# EAGLE board PygmyPI_v1p00 (EAGLE 5.11)
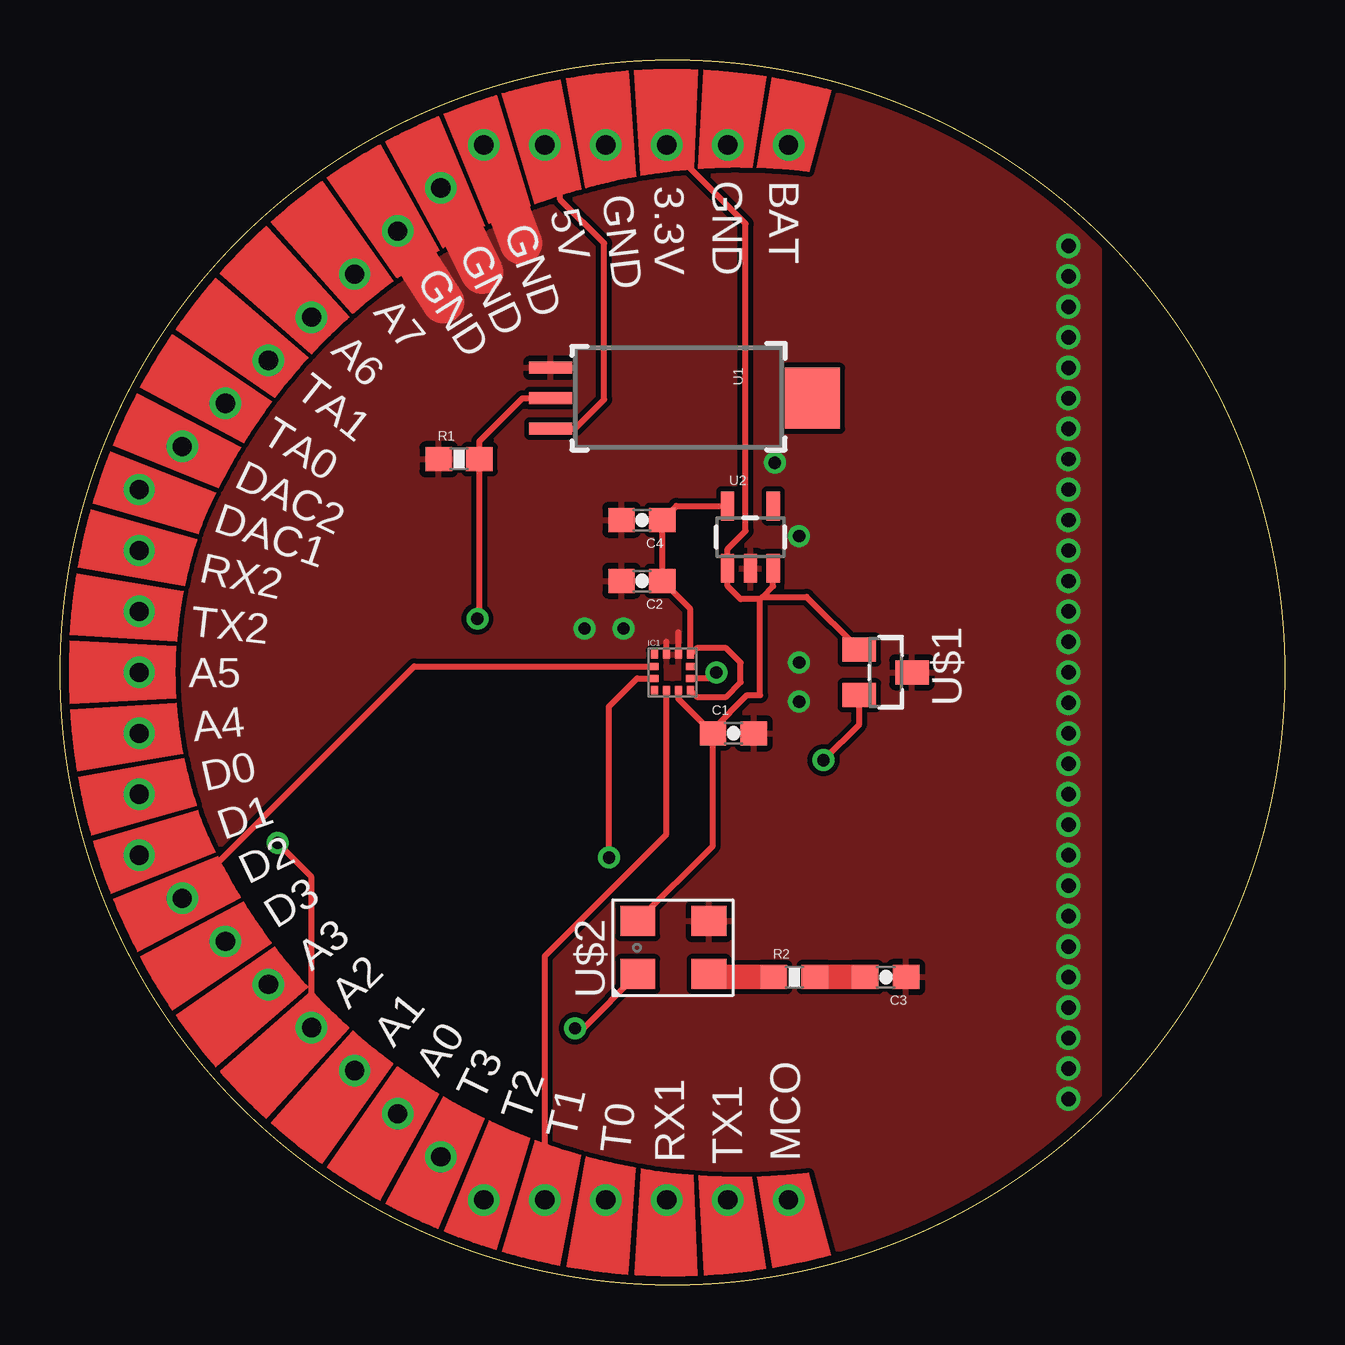
[diagram p0: board, top side]
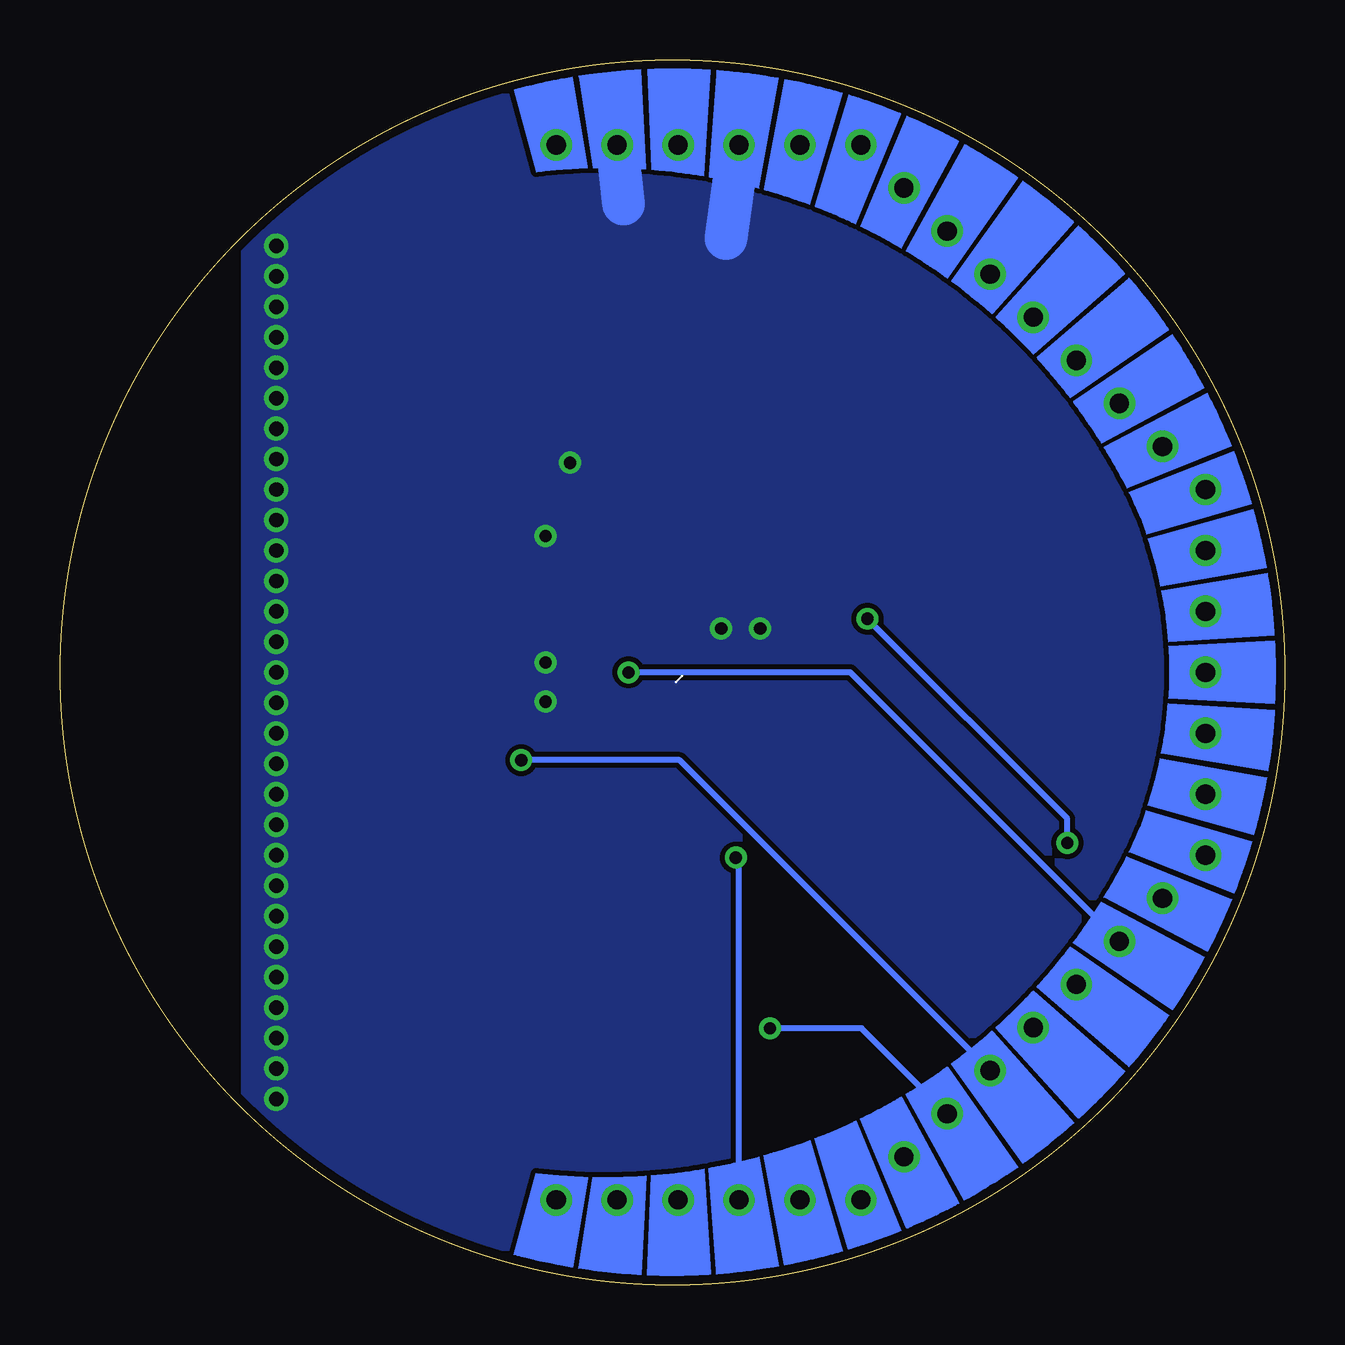
[diagram p1: board, bottom side, seen from below]

Size 51.05 x 51.05 mm. Coordinates in mm from the lower left corner, seen from the top.
Outline: circle at 25.53,25.53 radius 25.53
Copper layers (1*16): Top 0.035mm / dielectric 1.5mm / Bottom 0.035mm
Design rules "PDX (Proto)": minimum track width 6mil, minimum drill 15mil, track to track 6mil, track to pad 6mil, pad to pad 4mil, via to via 6mil, smd to smd 4mil, copper to edge 15mil, drill to drill 6mil, minimum pad ring 10mil, minimum via ring 8mil, stop-mask expansion 4mil, vias tented up to drill 0mil, thermal gap 10mil

## Footprints (pad centres in the part's own frame; a part is rotated, then mirrored left to right if it is on the bottom)
0603-CAP = smd 1.1 x 1: 1 -0.85,0; 2 0.85,0
#ETX-HOLES = drill 0.8 round: 3.3V -0.237,-21.988; 5V -5.316,-21.988; A0 -11.448,18.396; A1 -13.245,16.6; A2 -15.04,14.804; A3 -16.837,13.008; A4 -22.225,2.54; A5 -22.225,0; A6 -15.04,-14.804; A7 -13.245,-16.6; BAT 4.843,-21.988; COM1_RX -0.236,21.988; COM1_TX 2.304,21.988; COM2_RX -22.225,-5.08; COM2_TX -22.225,-2.54; D0 -22.225,5.08; D1 -22.225,7.62; D2 -20.429,9.416; D3 -18.633,11.212; DAC1 -22.225,-7.62; DAC2 -20.429,-9.416; GND1 -11.448,-18.396; GND2 -9.652,-20.192; GND3 -7.856,-21.988; GND4 -2.776,-21.988; GND5 2.303,-21.988; MCO 4.844,21.988; T0 -2.776,21.988; T1 -5.316,21.988; T2 -7.856,21.988; T3 -9.652,20.192; TA0 -18.633,-11.212; TA1 -16.837,-13.008
LGA12 = smd 0.3 x 0.35: 1 -0.75,-0.75; 2 -0.25,-0.75; 3 0.25,-0.75; 4 0.75,-0.75; 7 0.75,0.75; 8 0.25,0.75; 9 -0.25,0.75; 10 -0.75,0.75 | smd 0.35 x 0.3: 5 0.75,-0.25; 6 0.75,0.25; 11 -0.75,0.25; 12 -0.75,-0.25
0603-RES = smd 1.1 x 1: 1 -0.85,0; 2 0.85,0
HIH-4030 = smd 0.508 x 1.778: 1 -1.27,-5.08; 2 0,-5.08; 3 1.27,-5.08 | smd 2.54 x 2.286: NC 0,5.842
SOT23-5 = smd 0.55 x 1.2: 1 -0.95,-1.3; 2 0,-1.3; 3 0.95,-1.3; 4 0.95,1.3; 5 -0.95,1.3
SOT23 = smd 1 x 1.4: 1 -0.95,-1.1; 2 0.95,-1.1; 3 0,1.1
SPM0408HE5H = smd 1.245 x 1.448: 1 -1.143,1.448; 2 -1.143,-1.524; 3 1.067,-1.524; 4 1.067,1.448

## Placement (x,y rotation side)
C1  100nF  [0603-CAP]  28.07,22.99 0 top
C2  100nF  [0603-CAP]  24.26,29.34 180 top
C3  0.47uF  [0603-CAP]  34.42,12.83 180 top
C4  1uF  [0603-CAP]  24.26,31.88 180 top
FP1  #ETX-MAIN  [#ETX-HOLES]  25.53,25.53 180 bottom
IC1  BMA220LGA  [LGA12]  25.53,25.53 0 top
INFO1  Evan Teitelman  [CC-BY-SA]  -4.95,-12.57 0 top  (outside the outline)
PART1  #ETX-PARTRESTRICT  [#ETX-RESTRICT]  25.53,25.53 0 top
PART2  #ETX-PARTRESTRICT  [#ETX-RESTRICT]  25.53,25.53 180 bottom
PART3  #ETX-PARTSTOP  [#ETX-STOP]  25.53,25.53 180 bottom
PART4  #ETX-PARTSTOP  [#ETX-STOP]  25.53,25.53 0 top
PART5  #ETX-PARTPADS  [#ETX-PADS]  25.53,25.53 180 bottom
PART6  #ETX-PARTPADS  [#ETX-PADS]  25.53,25.53 0 top
PART7  #ETX-PARTLABELS_BOTTOM  [#ETX-LABELS_BOTT]  25.53,25.53 180 bottom
R1  80K  [0603-RES]  16.64,34.42 0 top
R2  0.0  [0603-RES]  30.61,12.83 0 top
U1  HIH-4030SMD  [HIH-4030]  25.53,36.96 270 top
U2  V_REG_LDOSMD  [SOT23-5]  28.78,31.17 0 top
U$1  MICROCHIP-TEMP-TC1047  [SOT23]  34.42,25.53 270 top
U$2  MIC_KNOWLES_SPM0408HE5H  [SPM0408HE5H]  25.53,14.1 90 top

## Library data of the parts
C1-C4 R1 R2 U1 U2 = SparkFun
FP1 PART1-PART7 U$2 = Pygmy
IC1 INFO1 = EagleLbr
U$1 = dublib

## Nets
1.8V: C2.1 C4.1 IC1.4 IC1.7 U2.5
3.3V: C1.1 FP1.3.3V IC1.3 U2.1 U2.3 U$1.1 U$2.4
5V: FP1.5V U1.3
GAIN: R2.1 U$2.2
GND: C1.2 C2.2 C3.1 C4.2 FP1.GND1 FP1.GND2 FP1.GND3 FP1.GND4 FP1.GND5 IC1.8 IC1.9 R1.1 U1.1 U2.2 U$1.3 U$2.3
INT: FP1.D3 IC1.5
MIC: FP1.A0 U$2.1
MOIS: FP1.A2 R1.2 U1.2
N$1: C3.2 R2.2
PS: FP1.D2 IC1.11
SCL: FP1.T0 IC1.12
SDA: FP1.T1 IC1.2
TEMP: FP1.A1 U$1.2

## Tracks (layer width: path | path; a pad name or v marks a point on that pad's centre or on a via)
1.8V
  Top 0.254: IC1.4 26.54,24.51 27.76,24.51 28.37,25.12 28.37,25.93 27.76,26.54 26.54,26.54 IC1.7 26.28,28.17 C2.1 C4.1 25.7,32.47 U2.5
3.3V
  Top 0.254: IC1.3 25.78,24.43 C1.1 | U2.3 29.73,29.12 29.29,28.68 | 29.18,28.57 29.29,28.68 | 29.18,28.57 28.37,28.57 27.83,29.12 U2.1 27.83,30.67 28.57,31.42 28.57,44.23 FP1.3.3V | C1.1 27.22,18.3 U$2.4 | C1.1 27.22,23.15 28.64,24.58 29.18,24.58 29.18,28.57 | U$1.1 31.12,28.68 29.29,28.68
5V
  Top 0.254: U1.3 21.46,35.69 22.68,36.91 22.68,43.41 20.85,45.24 20.85,46.87 FP1.5V
GAIN
  Top 1.016: U$2.2 27.18,12.83 R2.1
GND  (via drill 0.51, 0.6)
  Top 0.254: IC1.8 25.78,27.2 | 25.27,26.8 IC1.9
  Top 1.778: FP1.GND1 15.98,40.97 | 17.6,42.19 FP1.GND2 | FP1.GND3 19.23,43.41
  Bottom 1.778: 27.56,45.03 FP1.GND5 | FP1.GND4 23.29,43.61
  other vias: 42.04,42.04 42.04,40.77 42.04,39.5 42.04,38.23 42.04,36.96 42.04,35.69 42.04,33.15 42.04,34.42 42.04,31.88 42.04,30.61 42.04,29.34 42.04,28.07 42.04,26.8 42.04,25.53 42.04,24.26 42.04,22.99 42.04,21.72 42.04,20.45 42.04,19.18 42.04,17.91 42.04,16.64 42.04,15.37 42.04,14.1 42.04,12.83 42.04,11.56 42.04,10.29 42.04,9.02 42.04,7.75 42.04,43.31 23.5,27.36 21.87,27.36 30.81,25.93 30.81,24.31 30.81,31.22 29.79,34.26
  pour Top (isolate 0.203): -2.41,53.47 43.31,53.47 43.31,-2.41 -2.41,-2.41
  pour Bottom (isolate 0.203): -4.95,56.01 43.31,56.01 43.31,-4.95 -4.95,-4.95
INT  (via drill 0.51)
  Top 0.254: IC1.5 27.11,25.28 v27.36,25.53
  Bottom 0.254: v27.36,25.53 18.11,25.53 FP1.D3 | FP1.D3
MIC  (via drill 0.51)
  Top 0.254: U$2.1 21.82,10.69 v21.46,10.69
  Bottom 0.254: v21.46,10.69 17.64,10.69 FP1.A0
MOIS  (via drill 0.51)
  Top 0.254: U1.2 19.28,36.96 17.49,35.17 R1.2 17.49,27.85 v17.4,27.76 | v9.07,18.41 10.49,17 FP1.A2
  Bottom 0.254: v17.4,27.76 9.07,19.43 v9.07,18.41
N$1
  Top 1.016: R2.2 C3.2
PS
  Top 0.254: IC1.11 14.76,25.78 FP1.D2 | FP1.D2
SCL  (via drill 0.51)
  Top 0.254: v22.89,17.8 22.89,24.11 24.06,25.28 IC1.12
  Bottom 0.254: v22.89,17.8 22.75,17.67 FP1.T0
SDA
  Top 0.254: IC1.2 25.28,18.78 20.21,13.71 FP1.T1
TEMP  (via drill 0.51)
  Top 0.254: U$1.2 33.32,23.36 v31.83,21.87
  Bottom 0.254: v31.83,21.87 25.23,21.87 FP1.A1

## Text on the board
Document: Note: This Board Is Mirrored